# EAGLE board br1 (EAGLE 5.07)
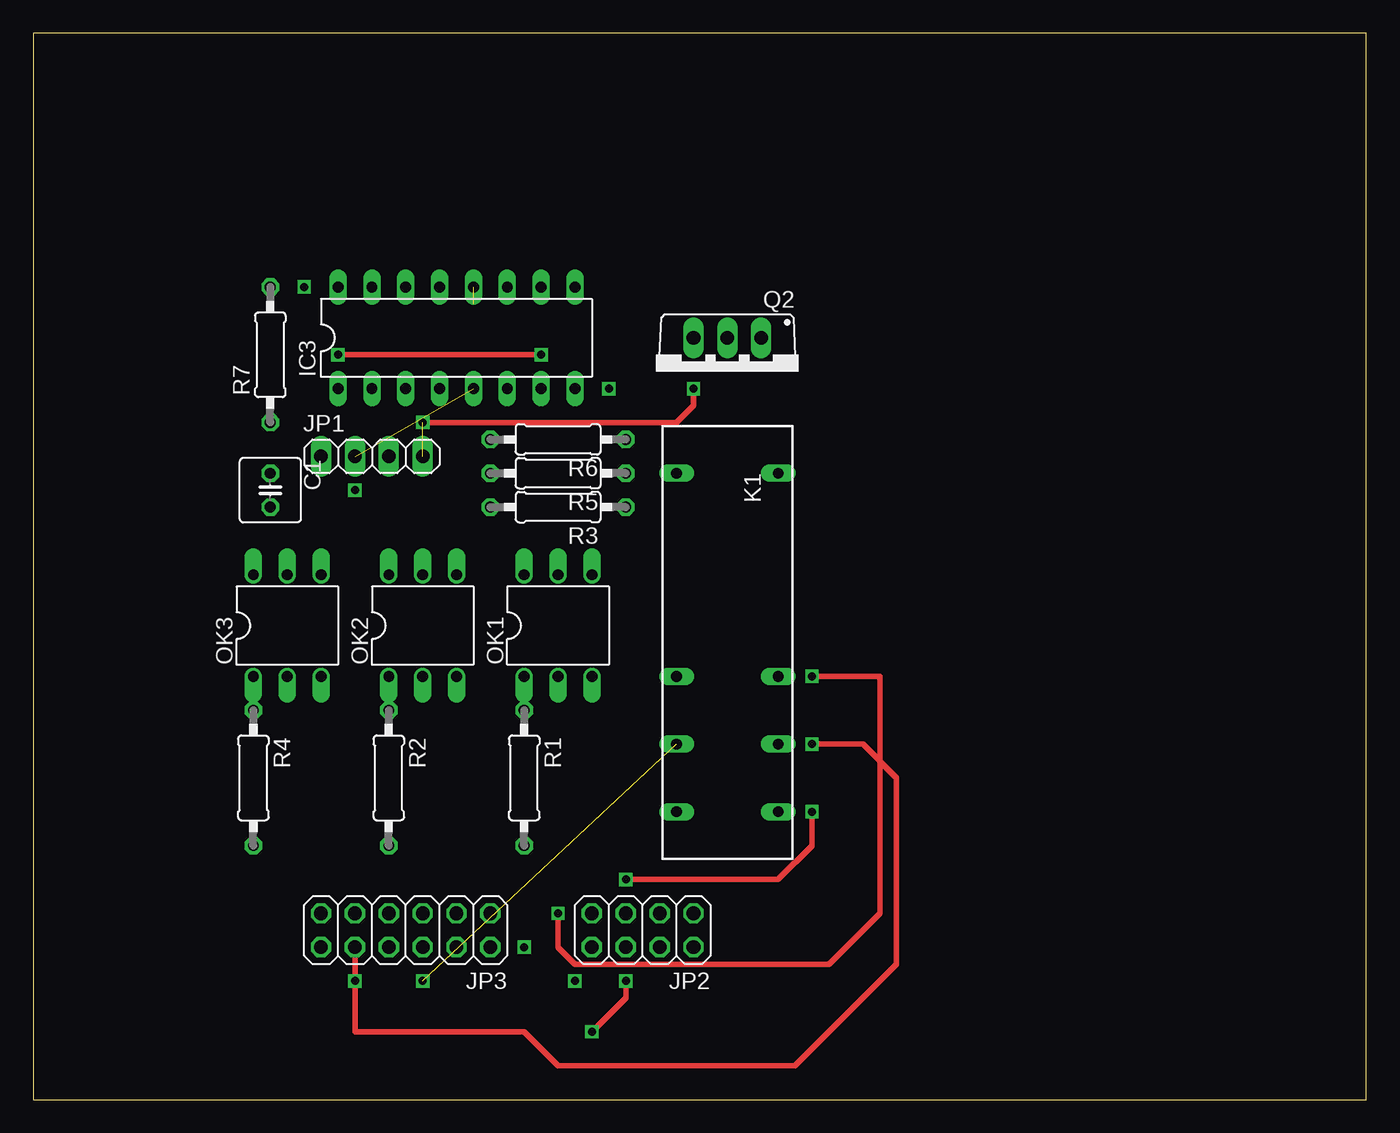
[diagram p0: board, top side]
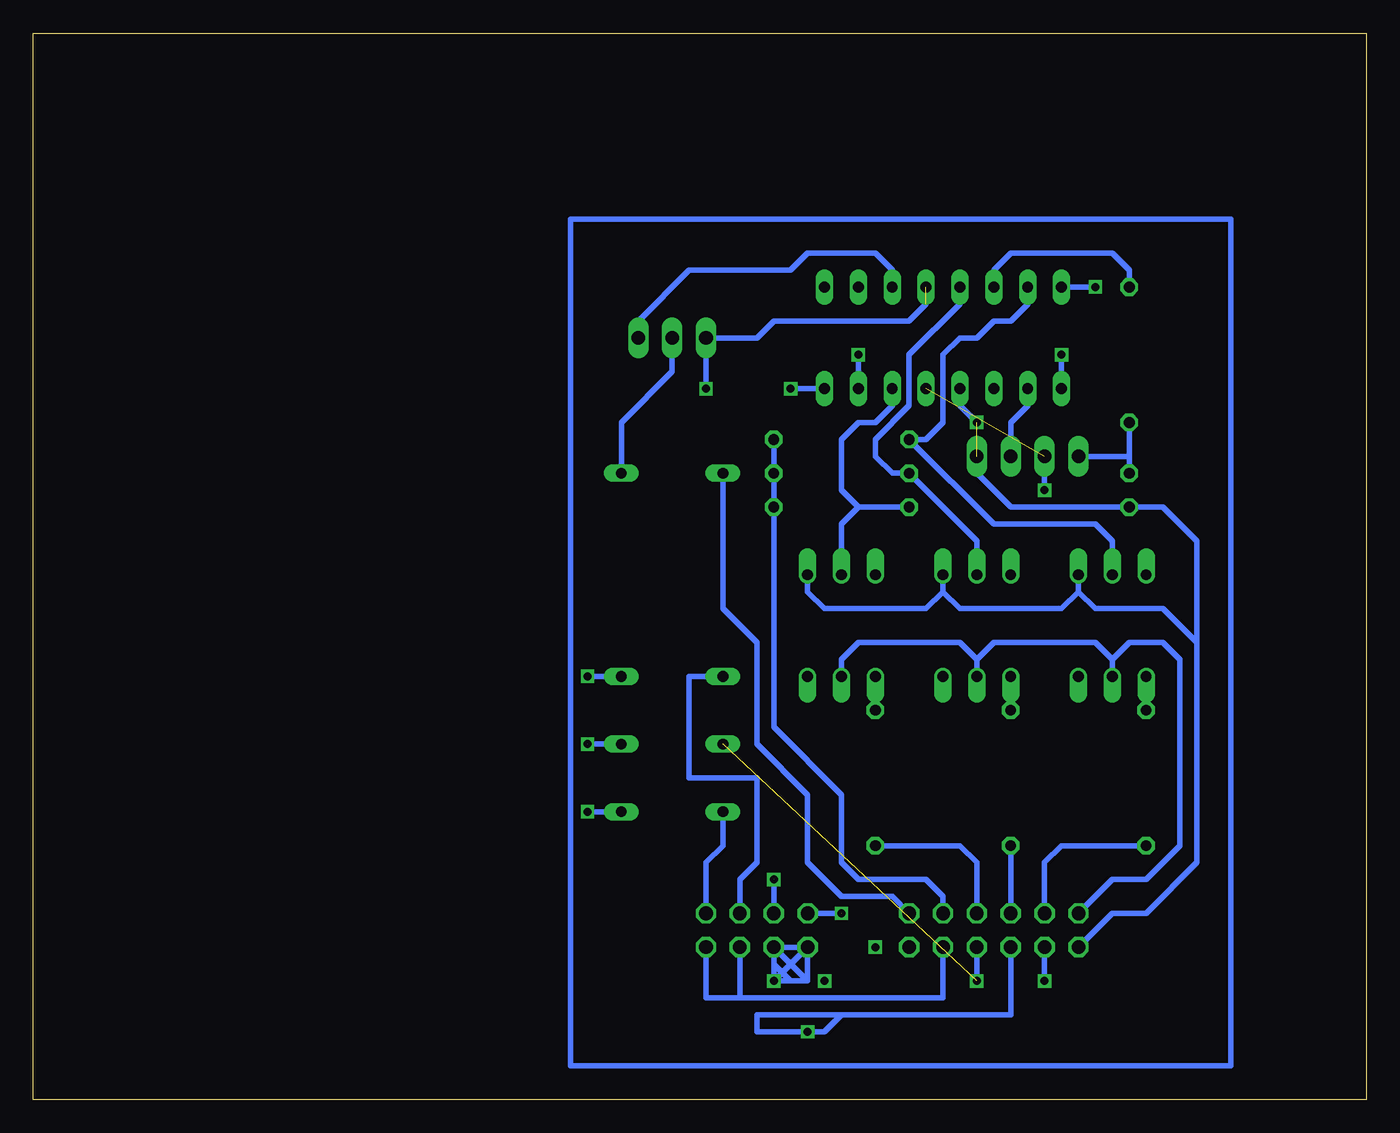
[diagram p1: board, bottom side, seen from below]

Size 100 x 80 mm. Coordinates in mm from the lower left corner, seen from the top.
Outline: 0,0 100,0 100,80 0,80 0,0
Copper layers (1*16): Top 0.0356mm / dielectric 1.5011mm / Bottom 0.0356mm
Design rules "default": minimum track width 7mil, minimum drill 14mil, track to track 7mil, track to pad 7mil, pad to pad 7mil, via to via 7mil, smd to smd 0mil, copper to edge 20mil, drill to drill 8mil, minimum pad ring 10mil, minimum via ring 8mil, stop-mask expansion 4mil, vias tented up to drill 0mil, thermal gap 10mil

## Footprints (pad centres in the part's own frame; a part is rotated, then mirrored left to right if it is on the bottom)
C025-050X050 = drill 0.813 octagon: 1 -1.27,0; 2 1.27,0
DIL16 = drill 0.813 long: 1 -8.89,-3.81; 2 -6.35,-3.81; 3 -3.81,-3.81; 4 -1.27,-3.81; 5 1.27,-3.81; 6 3.81,-3.81; 7 6.35,-3.81; 8 8.89,-3.81; 9 8.89,3.81; 10 6.35,3.81; 11 3.81,3.81; 12 1.27,3.81; 13 -1.27,3.81; 14 -3.81,3.81; 15 -6.35,3.81; 16 -8.89,3.81
1X04 = drill 1.016 long: 1 -3.81,0; 2 -1.27,0; 3 1.27,0; 4 3.81,0
2X04 = drill 1.016 octagon: 1 -3.81,-1.27; 2 -3.81,1.27; 3 -1.27,-1.27; 4 -1.27,1.27; 5 1.27,-1.27; 6 1.27,1.27; 7 3.81,-1.27; 8 3.81,1.27
2X06 = drill 1.016 octagon: 1 -6.35,-1.27; 2 -6.35,1.27; 3 -3.81,-1.27; 4 -3.81,1.27; 5 -1.27,-1.27; 6 -1.27,1.27; 7 1.27,-1.27; 8 1.27,1.27; 9 3.81,-1.27; 10 3.81,1.27; 11 6.35,-1.27; 12 6.35,1.27
NA = drill 0.8 long: 1 -6.35,-5.08; 3 8.89,-5.08; 4 13.97,-5.08; 5 19.05,-5.08; 8 19.05,2.54; 9 13.97,2.54; 10 8.89,2.54; 12 -6.35,2.54
DIL06 = drill 0.813 offset: 1 -2.54,-3.81; 2 0,-3.81; 3 2.54,-3.81; 4 2.54,3.81; 5 0,3.81; 6 -2.54,3.81
TO220BV = drill 1.016 long: D 0,-2.54; G -2.54,-2.54; S 2.54,-2.54
0207/10 = drill 0.813 octagon: 1 -5.08,0; 2 5.08,0

## Placement (x,y rotation side)
C1  [C025-050X050]  17.78,45.72 270 top
IC3  4502N  [DIL16]  31.75,57.15 0 top
JP1  [1X04]  25.4,48.26 0 top
JP2  [2X04]  45.72,12.7 180 top
JP3  [2X06]  27.94,12.7 180 top
K1  NA  [NA]  53.34,40.64 270 top
OK1  4N25M  [DIL06]  39.37,35.56 0 top
OK2  4N25M  [DIL06]  29.21,35.56 0 top
OK3  4N25M  [DIL06]  19.05,35.56 0 top
Q2  IRF740  [TO220BV]  52.07,54.61 180 top
R1  [0207/10]  36.83,24.13 270 top
R2  [0207/10]  26.67,24.13 270 top
R3  [0207/10]  39.37,44.45 180 top
R4  [0207/10]  16.51,24.13 270 top
R5  [0207/10]  39.37,46.99 180 top
R6  [0207/10]  39.37,49.53 180 top
R7  [0207/10]  17.78,55.88 90 top

## Library data of the parts
C1 R1-R7 = rcl
IC3 = 45xx
JP1-JP3 = pinhead
K1 = dbg-misc
OK1-OK3 = optocoupler
Q2 = transistor-power

## Nets
GND: C1.2 IC3.4 IC3.12 JP1.4 JP3.12 OK1.4 OK2.4 OK3.4 Q2.S
N$1: IC3.1 IC3.7
N$2: OK2.1 R2.1
N$3: K1.12 Q2.D
N$4: IC3.14 R7.2
N$5: JP3.3 R3.1 R5.1 R6.1
N$6: OK3.1 R4.1
N$7: C1.1 JP1.1 R7.1
N$8: OK1.1 R1.1
N$9: JP3.11 OK1.2 OK2.2 OK3.2
N$10: JP3.5 R1.2
N$12: JP3.7 R2.2
N$13: IC3.6 OK1.5 R3.2
N$14: JP3.9 R4.2
N$15: IC3.13 OK2.5 R5.2
N$16: IC3.15 OK3.5 R6.2
N$17: IC3.5 JP1.2
N$18: IC3.2 JP1.3
N$19: IC3.11 Q2.G
N$20: JP2.7 K1.10
N$21: JP2.5 K1.8
N$22: JP2.3 K1.3
N$23: JP2.1 K1.5
N$24: JP3.10 K1.9
N$25: JP3.6 K1.4
N$26: JP2.6 JP2.8 JP3.8
N$27: JP2.2 JP2.4 JP3.4
VCC: JP3.1 K1.1
VDD: IC3.16
VSS: IC3.8

## Tracks (layer width: path | path; a pad name or v marks a point on that pad's centre or on a via)
GND  (via drill 0.6)  (3 unrouted)
  Top 0.406: v49.53,53.34 49.53,52.07 48.26,50.8 29.21,50.8
  Bottom 0.406: JP3.12 19.05,13.97 16.51,13.97 12.7,17.78 12.7,34.29 | 12.7,34.29 15.24,36.83 20.32,36.83 21.59,38.1 | 21.59,38.1 OK3.4 | 21.59,38.1 22.86,36.83 30.48,36.83 31.75,38.1 | 31.75,38.1 OK2.4 | 31.75,38.1 33.02,36.83 40.64,36.83 41.91,38.1 OK1.4 | 12.7,34.29 12.7,41.91 15.24,44.45 C1.2 26.67,44.45 29.21,46.99 JP1.4 | IC3.4 30.48,52.07 29.21,50.8 | 33.02,59.69 34.29,58.42 44.45,58.42 45.72,57.15 Q2.S v49.53,53.34
N$1  (via drill 0.6)
  Top 0.406: v22.86,55.88 v38.1,55.88
  Bottom 0.406: IC3.1 v22.86,55.88 | v38.1,55.88 IC3.7
N$2
  Bottom 0.406: R2.1 OK2.1
N$3
  Bottom 0.406: Q2.D 52.07,54.61 55.88,50.8 K1.12
N$4
  Bottom 0.406: R7.2 17.78,62.23 19.05,63.5 26.67,63.5 27.94,62.23 IC3.14
N$5
  Bottom 0.406: JP3.3 31.75,15.24 33.02,16.51 38.1,16.51 39.37,17.78 39.37,22.86 44.45,27.94 R3.1 R5.1 R6.1
N$6
  Bottom 0.406: R4.1 OK3.1
N$7
  Bottom 0.406: 17.78,48.26 R7.1 | C1.1 17.78,48.26 | 17.78,48.26 JP1.1
N$8
  Bottom 0.406: R1.1 OK1.1
N$9
  Bottom 0.406: 19.05,33.02 OK3.2 | 19.05,33.02 20.32,34.29 27.94,34.29 29.21,33.02 | 29.21,33.02 OK2.2 | 29.21,33.02 30.48,34.29 38.1,34.29 39.37,33.02 OK1.2 | JP3.11 19.05,16.51 16.51,16.51 13.97,19.05 13.97,33.02 15.24,34.29 17.78,34.29 19.05,33.02
N$10
  Bottom 0.406: R1.2 30.48,19.05 29.21,17.78 JP3.5
N$12
  Bottom 0.406: JP3.7 R2.2
N$13
  Bottom 0.406: OK1.5 39.37,43.18 38.1,44.45 | R3.2 38.1,44.45 | IC3.6 35.56,52.07 36.83,50.8 38.1,50.8 39.37,49.53 39.37,45.72 38.1,44.45
N$14
  Bottom 0.406: R4.2 22.86,19.05 24.13,17.78 JP3.9
N$15
  Bottom 0.406: OK2.5 29.21,41.91 R5.2 35.56,46.99 36.83,48.26 36.83,49.53 34.29,52.07 34.29,55.88 30.48,59.69 IC3.13
N$16
  Bottom 0.406: OK3.5 19.05,41.91 20.32,43.18 27.94,43.18 R6.2 33.02,49.53 31.75,50.8 31.75,55.88 30.48,57.15 29.21,57.15 27.94,58.42 26.67,58.42 25.4,59.69 IC3.15
N$17  (1 unrouted)
  Bottom 0.406: 24.13,45.72 JP1.2
N$18
  Bottom 0.406: IC3.2 25.4,52.07 26.67,50.8 JP1.3
N$19
  Bottom 0.406: Q2.G 54.61,58.42 50.8,62.23 43.18,62.23 41.91,63.5 36.83,63.5 35.56,62.23 IC3.11
N$20  (via drill 0.6)  (1 unrouted)
  Top 0.406: v58.42,31.75 63.5,31.75 63.5,13.97 59.69,10.16 40.64,10.16 39.37,11.43 39.37,13.97
  Bottom 0.406: 39.37,13.97 JP2.7 | K1.10 v58.42,31.75
N$21  (via drill 0.6)  (1 unrouted)
  Top 0.406: v58.42,21.59 58.42,19.05 55.88,16.51 44.45,16.51
  Bottom 0.406: JP2.5 44.45,16.51 | K1.8 v58.42,21.59
N$22
  Bottom 0.406: JP2.3 46.99,16.51 45.72,17.78 45.72,24.13 50.8,24.13 50.8,31.75 K1.3
N$23
  Bottom 0.406: K1.5 48.26,19.05 49.53,17.78 JP2.1
N$24  (1 unrouted)
  Top 0.406: JP3.10 24.13,5.08 36.83,5.08 39.37,2.54 57.15,2.54 64.77,10.16 64.77,24.13 62.23,26.67 58.42,26.67
  Bottom 0.406: 24.13,8.89 JP3.10 | K1.9 58.42,26.67
N$25  (1 unrouted)
  Bottom 0.406: 29.21,8.89 JP3.6
N$26  (via drill 0.6)
  Top 0.406: v44.45,8.89 44.45,7.62 v41.91,5.08
  Bottom 0.406: JP3.8 26.67,6.35 39.37,6.35 | 39.37,6.35 40.64,5.08 v41.91,5.08 45.72,5.08 45.72,6.35 39.37,6.35 | JP2.8 JP2.6 | JP2.6 41.91,8.89 | JP2.8 41.91,8.89 | v44.45,8.89 JP2.8 | v44.45,8.89 JP2.6 | JP2.6 44.45,10.16 43.18,8.89 | 43.18,8.89 41.91,8.89 | v44.45,8.89 43.18,8.89
N$27
  Bottom 0.406: JP3.4 31.75,7.62 46.99,7.62 | JP2.4 46.99,7.62 | 46.99,7.62 49.53,7.62 JP2.2
N$28  (via drill 0.6)
  other vias: 29.21,50.8
N$29  (via drill 0.6)
  other vias: 22.86,55.88
N$30  (via drill 0.6)
  other vias: 38.1,55.88
N$31  (via drill 0.6)
  other vias: 24.13,45.72
N$32  (via drill 0.6)
  other vias: 40.64,8.89
N$33  (via drill 0.6)
  other vias: 29.21,8.89
N$34  (via drill 0.6)
  other vias: 36.83,11.43
N$35  (via drill 0.6)
  other vias: 24.13,8.89
N$36  (via drill 0.6)
  other vias: 44.45,16.51
N$37  (via drill 0.6)
  other vias: 39.37,13.97
N$38  (via drill 0.6)
  other vias: 58.42,21.59
N$39  (via drill 0.6)
  other vias: 58.42,26.67
N$40  (via drill 0.6)
  other vias: 58.42,31.75
N$41  (via drill 0.6)
  other vias: 49.53,53.34
N$42
  Bottom 0.406: 10.16,2.54 59.69,2.54 59.69,66.04 10.16,66.04 10.16,2.54
VCC
  Bottom 0.406: JP3.1 35.56,15.24 39.37,15.24 41.91,17.78 41.91,22.86 45.72,26.67 45.72,34.29 48.26,36.83 K1.1
VDD  (via drill 0.6)
  Bottom 0.406: v20.32,60.96 IC3.16
VSS  (via drill 0.6)
  Bottom 0.406: IC3.8 v43.18,53.34